# Altium PCB LEDController.PcbDoc
Units mm, origin at the board's own origin, x right, y up, seen from the top; angles counter-clockwise.
Board outline 13.9 x 8.4 mm, 2 copper layers (Top Layer, Bottom Layer), stack 0.67 mm thick; 17 components, 29 nets, 78 pads, 20 vias.
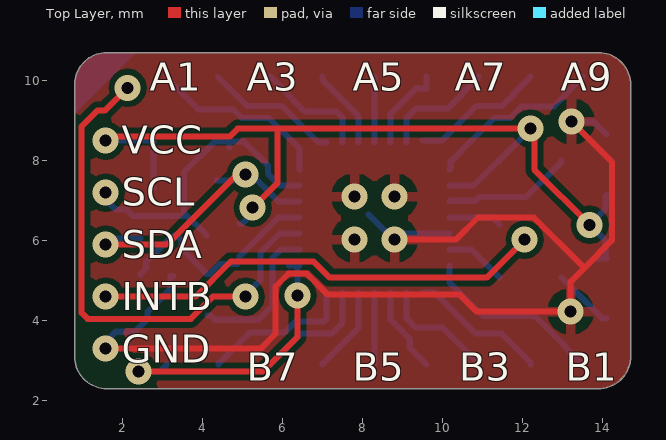
[diagram p0: Top Layer view]
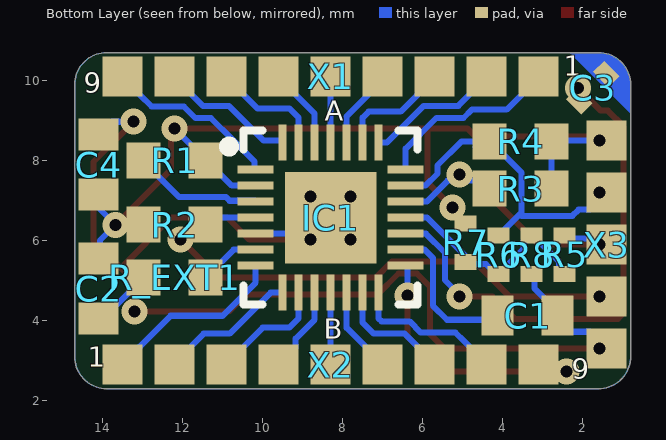
[diagram p1: Bottom Layer view, seen from below]
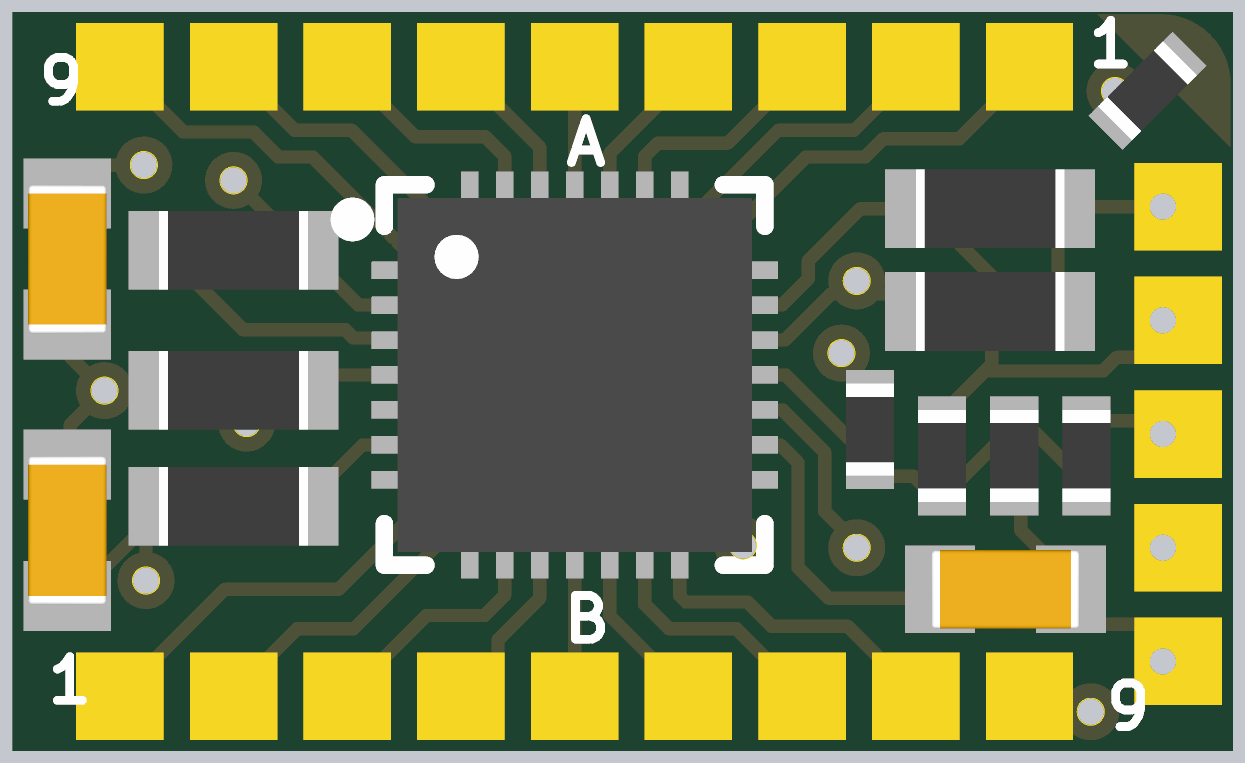
[diagram p2: 3D render of the assembled board from below, using the file's embedded part models]

## Layer stack, top to bottom
Top Solder: solder mask 0.0102, Solder Resist, Dk 3.5
Top Layer: signal copper 0.035
Dielectric 1: dielectric 0.6, FR-4, Dk 4.8
Bottom Layer: signal copper 0.035
Bottom Solder: solder mask 0.0102, Solder Resist, Dk 3.5

## Board outline
0.8,3.1 0.8,9.9 cw(c1.6,9.9) 1.6,10.7 13.9,10.7 cw(c13.9,9.9) 14.7,9.9 14.7,3.1 cw(c13.9,3.1) 13.9,2.3 1.6,2.3 cw(c1.6,3.1)

## Design rules (kind name [scope] priority, off if disabled: settings)
Clearance [All] p1: gap=0.152 ignorepadtopadclearanceinfootprint=FALSE
HoleSize [All] p1: absolutevalues=TRUE maxlimit=20.54 minlimit=0.3 maxpercent=80.000 minpercent=20.000
HoleToHoleClearance [All] p1: gap=0.1 allowstackedmicrovias=TRUE
MinimumSolderMaskSliver [All] p1: minsoldermaskwidth=0.4
PolygonConnect [All] p1: connectstyle=Relief reliefconductorwidth=0.254 reliefentries=4 polygonreliefangle="90 Angle" airgapwidth=0.254
RoutingVias [All] p1: holewidth=0.3 width=0.65 viastyle="Through Hole" minholewidth=0.3 minwidth=0.65 maxholewidth=5 maxwidth=10
SilkToSilkClearance [All] p1: silktosilkclearance=0
SilkToSolderMaskClearance [IsPad] p1: minsilkscreentomaskgap=0 clearancetoexposedcopper=TRUE
SolderMaskExpansion [All] p1: expansion=0
Width [All] p1: maxlimit=2.54 minlimit=0.152 preferedwidth=0.254
25 further rules are at their usual default settings.

## Components (designator, comment, footprint, x,y, rotation, side; value= is the part's Value field where it differs from the comment)
C1 "100nF" CL10B104KB8NNNC 3.375,4.125 r0 bottom
C2 "100nF" CL10B104KB8NNNC 14.1,4.8 r90 bottom
C3 "220nF" RC0402 1.75,9.825 r315 bottom
C4 "1µF" CL10B104KB8NNNC 14.1,7.9 r270 bottom
IC1 "IS31FL3731C" IS31FL3731 8.3,6.575 r180 bottom
R1 "4k7" RC0603 12.2,8 r180 bottom
R2 "4k7" RC0603 12.2,6.4 r0 bottom
R3 "4k7" RC0603 3.55,7.3 r180 bottom
R4 "4k7" RC0603 3.55,8.475 r180 bottom
R5 "0" RC0402 2.45,5.65 r270 bottom
R6 "0" RC0402 4.1,5.65 r270 bottom
R7 "0" RC0402 4.925,5.95 r270 bottom
R8 "0" RC0402 3.275,5.65 r90 bottom
R_EXT1 "20k" RC0603 12.2,5.075 r0 bottom
X1 "A" Connector 8.3,10.1 r0 bottom
X2 "B" Connector 8.3,2.9 r180 bottom
X3 "Connector_5" Connector_5 1.4,5.9 r90 bottom

## Footprints (in the part's own frame and the unit in brackets; to place one, negate y for a bottom-side part, rotate by r counter-clockwise, add the part's x,y. Pads: shape width x height; smd on the part's side, far side on the other; paste and mask are expansions set on the pad)
CL10B104KB8NNNC [mm]
  rect 0.8x1 smd: 1(-0.75,0) 2(0.75,0)
  body extent -0.85,-0.45 0.85,0.45, height 0.9
Connector [mm]
  rect 1x1 smd paste-25.4: 1(-5.2,0) 2(-3.9,0) 3(-2.6,0) 4(-1.3,0) 5(0,0) 6(1.3,0) 7(2.6,0) 8(3.9,0) 9(5.2,0)
Connector_5 [mm]
  rect 1x1 smd paste-25.4: 1(-2.6,0) 2(-1.3,0) 3(0,0) 4(1.3,0) 5(2.6,0)
IS31FL3731 [mm] "QFN, 28-Leads, Body 4,00x4,00mm, Pitch 0,40mm, Thermal Pad 2,28x2,28mm, IPC Medium Density"
  rect 0.9x0.2 smd: 1(-1.875,1.2) 2(-1.875,0.8) 3(-1.875,0.4) 4(-1.875,0) 5(-1.875,-0.4) 6(-1.875,-0.8) 7(-1.875,-1.2) 15(1.875,-1.2) 16(1.875,-0.8) 17(1.875,-0.4) 18(1.875,0) 19(1.875,0.4) 20(1.875,0.8) 21(1.875,1.2)
  rect 0.2x0.9 smd: 8(-1.2,-1.875) 9(-0.8,-1.875) 10(-0.4,-1.875) 11(0,-1.875) 12(0.4,-1.875) 13(0.8,-1.875) 14(1.2,-1.875) 22(1.2,1.875) 23(0.8,1.875) 24(0.4,1.875) 25(0,1.875) 26(-0.4,1.875) 27(-0.8,1.875) 28(-1.2,1.875)
  rect 2.28x2.28 smd paste-254: 29(0,0)
  silkscreen extent -2.67,-2.17 2.17,2.17, body extent -2.03,-2.03 2.03,2.03, height 0.75
RC0402 [mm]
  rect 0.4x0.55 smd: 1(-0.48,0) 2(0.48,0)
  body extent -0.52,-0.28 0.53,0.28, height 0.4
RC0603 [mm]
  rect 0.85x0.9 smd: 1(-0.775,0) 2(0.775,0)
  body extent -0.85,-0.45 0.85,0.45, height 0.55

## Part data
C1 C2: library part CL10B104KB8NNNC, "Capacitor: ceramic; MLCC; 100nF; 50V; X7R; ±10%; SMD; 0603; -55÷125°C", Case/Package=0603, Case Code (Metric)=1608, Dielectric=X7R, Manufacturer=Samsung, Max Operating Temperature=125°C, Min Operating Temperature=-55°C, Package Quantity=1, Supplier Part Number 1=1276-1000-1-ND, Tolerance=10%, Voltage=50V, Capacitance=100nF, Case Code (Imperial)=0603, ComponentLink1Description=https://datasheet.ciiva.com/25803/cl10b104kb8nnnc-25803393.pdf?src-supplier=Digi-Key, ComponentLink1URL=https://datasheet.ciiva.com/25803/cl10b104kb8nnnc-25803393.pdf?src-supplier=Digi-Key, ComponentLink2Description=https://datasheet.ciiva.com/26838/getdatasheetpartid-89097-26838411.pdf?src-supplier=Verical, ComponentLink2URL=https://datasheet.ciiva.com/26838/getdatasheetpartid-89097-26838411.pdf?src-supplier=Verical, ComponentLink3Description=https://datasheet.ciiva.com/29198/456651-da-01-en-vs-kondensator-0605-29198839.pdf?src-supplier=Conrad, ComponentLink3URL=https://datasheet.ciiva.com/29198/456651-da-01-en-vs-kondensator-0605-29198839.pdf?src-supplier=Conrad, Contact Plating=Tin, Depth=0.8mm, Height=0.8mm, Lead Free="Lead Free", Length=1.6mm, Manufacturer Part Number=CL10B104KB8NNNC, Material=Ceramic, Mount="Surface Mount", Packaging="Tape and Reel", Pricing 1="1 = 0,10000, 10 = 0,02800, 100 = 0,01230, 500 = 0,00878, 1000 = 0,00690 (USD)", Radiation Hardening=No, RoHS=Yes, Stock 1=12121642, Supplier 1=Digi-Key, Thickness=0.035inch, Voltage Rating=50V, Voltage Rating (DC)=50V, Width=0.031inch
C3: library part CC0402KRX5R6BB224, "CAP CER 0.22UF 10V X5R 0402", Case/Package=0402, Case Code (Metric)=1005, Dielectric=X5R, Dielectric Material=Ceramic, Manufacturer=Yageo, Max Operating Temperature=85°C, Min Operating Temperature=-55°C, Package Quantity=10000, Supplier Part Number 1=311-1421-1-ND, Tolerance=10%, Voltage Rating=10V, Capacitance=220nF, Case Code (Imperial)=0402, ComponentLink1Description=https://datasheet.ciiva.com/176/mlccorderingcode-176912.pdf?src-supplier=Digi-Key, ComponentLink1URL=https://datasheet.ciiva.com/176/mlccorderingcode-176912.pdf?src-supplier=Digi-Key, ComponentLink2Description=https://datasheet.ciiva.com/176/mlccorderingcode-176913.pdf?src-supplier=Digi-Key, ComponentLink2URL=https://datasheet.ciiva.com/176/mlccorderingcode-176913.pdf?src-supplier=Digi-Key, ComponentLink3Description=https://datasheet.ciiva.com/8033/1525783-8033653.pdf?src-supplier=Element14, ComponentLink3URL=https://datasheet.ciiva.com/8033/1525783-8033653.pdf?src-supplier=Element14, ComponentLink4Description=https://datasheet.ciiva.com/16624/upy-gphc-x5r-4v-to-50v-12-16624733.pdf?src-supplier=Avnet+Europe, ComponentLink4URL=https://datasheet.ciiva.com/16624/upy-gphc-x5r-4v-to-50v-12-16624733.pdf?src-supplier=Avnet+Europe, ComponentLink5Description=https://datasheet.ciiva.com/28450/1359354-28450298.pdf?src-supplier=Element14, ComponentLink5URL=https://datasheet.ciiva.com/28450/1359354-28450298.pdf?src-supplier=Element14, ComponentLink6Description=https://datasheet.ciiva.com/176/mlccorderingcode-176911.pdf?src-supplier=Digi-Key, ComponentLink6URL=https://datasheet.ciiva.com/176/mlccorderingcode-176911.pdf?src-supplier=Digi-Key, Composition=Ceramic, Depth=0.5mm, Halogen Free="Halogen Free", Height=0.5mm, Lead Free="Lead Free", Length=1mm, Manufacturer Part Number=CC0402KRX5R6BB224, Mount="Surface Mount", Packaging="Tape and Reel", Pricing 1="1 = 0,10000, 10 = 0,05700, 100 = 0,02530, 500 = 0,01808, 1000 = 0,01421, 2500 = 0,01292, 5000 = 0,01188 (USD)", Radiation Hardening=No, REACH SVHC=Unknown, RoHS=Yes, Stock 1=215238, Supplier 1=Digi-Key, Termination=SMD/SMT, Thickness=0.022inch, Voltage Rating (DC)=10V, Weight=2.3E-05oz, Width=0.02inch
C4: library part CL10A105KA8NNNC, "Cap Ceramic 1uF 25V X5R 10% Pad SMD 0603 85°C T/R", Capacitance=1uF, Case/Package=0603, Case Code (Metric)=1608, Dielectric=X5R, Manufacturer=Samsung, Max Operating Temperature=85°C, Min Operating Temperature=-55°C, Package Quantity=1, Supplier Part Number 1=1276-1102-1-ND, Tolerance=10%, Voltage=25V, Case Code (Imperial)=0603, ComponentLink1Description=https://datasheet.ciiva.com/25801/cl10a105ka8nnnc-25801364.pdf?src-supplier=Digi-Key, ComponentLink1URL=https://datasheet.ciiva.com/25801/cl10a105ka8nnnc-25801364.pdf?src-supplier=Digi-Key, ComponentLink2Description=https://datasheet.ciiva.com/26838/getdatasheetpartid-357530-26838332.pdf?src-supplier=Verical, ComponentLink2URL=https://datasheet.ciiva.com/26838/getdatasheetpartid-357530-26838332.pdf?src-supplier=Verical, ComponentLink3Description=https://datasheet.ciiva.com/29198/458162-da-01-en-vs-kondensator-0603-29198475.pdf?src-supplier=Conrad, ComponentLink3URL=https://datasheet.ciiva.com/29198/458162-da-01-en-vs-kondensator-0603-29198475.pdf?src-supplier=Conrad, Contact Plating=Tin, Depth=0.8mm, Height=0.8mm, Lead Free="Lead Free", Length=1.6mm, Manufacturer Part Number=CL10A105KA8NNNC, Material=Ceramic, Mount="Surface Mount", Packaging="Tape and Reel", Pricing 1="1 = 0,100000, 10 = 0,041000, 100 = 0,018500, 500 = 0,013200, 1000 = 0,010370 (USD)", Radiation Hardening=No, RoHS=Yes, Stock 1=5127242, Supplier 1=Digi-Key, Thickness=0.035inch, Voltage Rating=25V, Voltage Rating (DC)=25V, Width=0.031inch
IC1: library part IS31FL3731C-QFLS2-TR, "LED Lighting Drivers Audio Modulated 144 Dot LED Driver", Case/Package=QFN, Frequency=400kHz, High Level Output Current=5nA, Manufacturer=ISSI, Max Operating Temperature=85°C, Max Supply Current=2.17mA, Max Supply Voltage=5.5V, Min Operating Temperature=-40°C, Output Current=34mA, Package Quantity=2500, Supplier Part Number 1=706-1480-1-ND, ComponentLink1Description=http://www.mouser.com/ds/2/198/31FL3731-258525.pdf?src-supplier=Mouser, ComponentLink1URL=http://www.mouser.com/ds/2/198/31FL3731-258525.pdf?src-supplier=Mouser, ComponentLink2Description=http://www.issi.com/WW/pdf/Analog_Part_Decoder.pdf?src-supplier=Digi-Key, ComponentLink2URL=http://www.issi.com/WW/pdf/Analog_Part_Decoder.pdf?src-supplier=Digi-Key, Dimming=Analog, Low Level Output Current=5nA, Manufacturer Part Number=IS31FL3731C-QFLS2-TR, Mount="Surface Mount", Number of Outputs=18, Number of Pins=28, Output Current per Channel=34mA, Packaging="Tape and Reel", Pricing 1="1 = 2,01000, 10 = 1,81700, 25 = 1,62240, 100 = 1,46000, 250 = 1,29780, 500 = 1,13558, 1000 = 0,94091 (USD)", RoHS=Yes, Stock 1=2653, Supplier 1=Digi-Key, Weight=0.002497oz
R1 R2 R3 R4: library part RC0603JR-074K7L, "RES SMD 4.7K OHM 5% 1/10W 0603", Case/Package=0603, Case Code (Metric)=1608, Manufacturer=Yageo, Max Operating Temperature=155°C, Min Operating Temperature=-55°C, Power Rating=100mW, Resistance=4.7kR, Supplier Part Number 1=311-4.7KGRCT-ND, Temperature Coefficient=100ppm/°C, Tolerance=5%, Voltage Rating=50V, Case Code (Imperial)=0603, ComponentLink1Description=https://datasheet.ciiva.com/46412/443971-46412858.pdf?src-supplier=Element14, ComponentLink1URL=https://datasheet.ciiva.com/46412/443971-46412858.pdf?src-supplier=Element14, Composition="Thick Film", Depth=0.8mm, Lead Free="Lead Free", Length=1.6mm, Manufacturer Part Number=RC0603JR-074K7L, Military Standard=Not, Number of Pins=2, Packaging="Tape and Reel", Pricing 1="1 = 0,10000, 10 = 0,02000, 100 = 0,00810, 1000 = 0,00362, 2500 = 0,00314 (USD)", REACH SVHC="No SVHC", RoHS=Yes, Stock 1=16673716, Supplier 1=Digi-Key, Termination=SMD/SMT, Voltage Rating (DC)=50V, Width=0.8mm
R5 R6 R7 R8: library part RC0402JR-070RL, "RES SMD 0 OHM JUMPER 1/16W 0402", Case/Package=0402, Case Code (Metric)=1005, Manufacturer=Yageo, Max Operating Temperature=155°C, Max Power Dissipation=63mW, Min Operating Temperature=-55°C, Package Quantity=1, Power Rating=62.5mW, Resistance=0mR, Supplier Part Number 1=311-0.0JRCT-ND, Temperature Coefficient=200ppm/°C, Tolerance=5%, Voltage Rating=50V, Case Code (Imperial)=0402, ComponentLink1Description=https://datasheet.ciiva.com/2452/pyu-rc0402-51-rohs-l-6-2452608.pdf?src-supplier=Digi-Key, ComponentLink1URL=https://datasheet.ciiva.com/2452/pyu-rc0402-51-rohs-l-6-2452608.pdf?src-supplier=Digi-Key, ComponentLink2Description=https://datasheet.ciiva.com/11808/0900766b80c66297-11808195.pdf?src-supplier=RSComponents, ComponentLink2URL=https://datasheet.ciiva.com/11808/0900766b80c66297-11808195.pdf?src-supplier=RSComponents, ComponentLink3Description=https://datasheet.ciiva.com/2452/pyu-r-int-thick-7-2452609.pdf?src-supplier=Digi-Key, ComponentLink3URL=https://datasheet.ciiva.com/2452/pyu-r-int-thick-7-2452609.pdf?src-supplier=Digi-Key, ComponentLink4Description=https://datasheet.ciiva.com/2452/pyu-r-int-thick-7-2452610.pdf?src-supplier=Digi-Key, ComponentLink4URL=https://datasheet.ciiva.com/2452/pyu-r-int-thick-7-2452610.pdf?src-supplier=Digi-Key, ComponentLink5Description=https://datasheet.ciiva.com/8896/pyu-rc0402-51-rohs-l-6-8896201.pdf?src-supplier=Avnet, ComponentLink5URL=https://datasheet.ciiva.com/8896/pyu-rc0402-51-rohs-l-6-8896201.pdf?src-supplier=Avnet, ComponentLink6Description=https://datasheet.ciiva.com/28386/pyu-rc0402-51-rohs-l-6-28386633.pdf?src-supplier=Avnet+Europe, ComponentLink6URL=https://datasheet.ciiva.com/28386/pyu-rc0402-51-rohs-l-6-28386633.pdf?src-supplier=Avnet+Europe, ComponentLink7Description=https://datasheet.ciiva.com/22747/1018594-22747515.pdf?src-supplier=Element14, ComponentLink7URL=https://datasheet.ciiva.com/22747/1018594-22747515.pdf?src-supplier=Element14, ComponentLink8Description=https://datasheet.ciiva.com/15189/getdatasheetpartid-326379-15189533.pdf?src-supplier=Verical, ComponentLink8URL=https://datasheet.ciiva.com/15189/getdatasheetpartid-326379-15189533.pdf?src-supplier=Verical, ComponentLink9Description=https://datasheet.ciiva.com/7983/1018594-7983535.pdf?src-supplier=Element14, ComponentLink9URL=https://datasheet.ciiva.com/7983/1018594-7983535.pdf?src-supplier=Element14, Composition="Thick Film", Contact Plating=Tin, Depth=0.5mm, Features="Moisture Resistant", Height=0.016inch, Lead Free="Lead Free", Length=1mm, Manufacturer Part Number=RC0402JR-070RL, Military Standard=Not, Number of Terminations=2, Packaging="Tape and Reel", Pricing 1="1 = 0,10000, 10 = 0,01500, 25 = 0,01080, 50 = 0,00800, 100 = 0,00600, 250 = 0,00456, 500 = 0,00364, 1000 = 0,00268, 5000 = 0,00192 (USD)", Radiation Hardening=No, REACH SVHC=Unknown, RoHS=Yes, Stock 1=80146051, Supplier 1=Digi-Key, Termination=SMD/SMT, Width=0.02inch
R_EXT1: library part RC0603FR-0720KL, "RES SMD 20K OHM 1% 1/10W 0603", Case/Package=0603, Case Code (Metric)=1608, Manufacturer=Yageo, Max Operating Temperature=155°C, Max Power Dissipation=100mW, Min Operating Temperature=-55°C, Package Quantity=1, Resistance=20kR, Supplier Part Number 1=311-20.0KHRCT-ND, Temperature Coefficient=100ppm/°C, Tolerance=1%, Voltage Rating=50V, Case Code (Imperial)=0603, ComponentLink1Description=https://datasheet.ciiva.com/11808/0900766b80f96399-11808275.pdf?src-supplier=RSComponents, ComponentLink1URL=https://datasheet.ciiva.com/11808/0900766b80f96399-11808275.pdf?src-supplier=RSComponents, ComponentLink2Description=https://datasheet.ciiva.com/22747/443971-22747525.pdf?src-supplier=Element14, ComponentLink2URL=https://datasheet.ciiva.com/22747/443971-22747525.pdf?src-supplier=Element14, ComponentLink3Description=https://datasheet.ciiva.com/2453/pyu-r-int-thick-7-2453910.pdf?src-supplier=Digi-Key, ComponentLink3URL=https://datasheet.ciiva.com/2453/pyu-r-int-thick-7-2453910.pdf?src-supplier=Digi-Key, ComponentLink4Description=https://datasheet.ciiva.com/2453/pyu-r-int-thick-7-2453911.pdf?src-supplier=Digi-Key, ComponentLink4URL=https://datasheet.ciiva.com/2453/pyu-r-int-thick-7-2453911.pdf?src-supplier=Digi-Key, ComponentLink5Description=https://datasheet.ciiva.com/2453/pyu-r-int-thick-7-2453912.pdf?src-supplier=Digi-Key, ComponentLink5URL=https://datasheet.ciiva.com/2453/pyu-r-int-thick-7-2453912.pdf?src-supplier=Digi-Key, Composition="Thick Film", Depth=0.8mm, Features="Moisture Resistant", Height=0.022inch, Lead Free="Lead Free", Length=0.063inch, Manufacturer Part Number=RC0603FR-0720KL, Military Standard=Not, Number of Pins=2, Number of Terminations=2, Packaging="Tape and Reel", Power Rating=100mW, Pricing 1="1 = 0,10000, 10 = 0,02400, 100 = 0,00970, 1000 = 0,00437, 2500 = 0,00379 (USD)", REACH SVHC="No SVHC", RoHS=Yes, Stock 1=8068424, Supplier 1=Digi-Key, Termination=SMD/SMT, Voltage Rating (DC)=50V, Width=0.031inch
X1 X2: library part Connector

## Via types
v1: diameter 0.65, hole 0.3, Top Layer to Bottom Layer, tented both sides, 15 vias
v2: diameter 0.65, hole 0.3, Top Layer to Bottom Layer, tented top, 5 vias

## Nets (pads, with @x,y where several pads share a name; then routed paths per layer and width w, separated by ;. In a path a pad name is that pad's centre, name@x,y a point inside that pad or via, vN(x,y) a via of type N, cw(c..) or ccw(c..) an arc to the next point about the centre after c; other vN are vias at no path point)
AD: IC1.18 R5.2 R6.2 R7.2 R8.2 | length 5.7
  Bottom Layer w0.152: R5.2@2.45,5.145 R5.2 2.59,5.31 2.59,5.47 3.2,6.08 R8.2@3.302,6.08 ; R8.2 3.35,6.13 3.474,6.006 3.474,5.796 R6.2 4.175,5.17 4.421,5.416 4.871,5.416 R7.2 4.925,5.61 5.89,6.575 IC1.18
Audio: C3.1
CA1: IC1.21 X1.1 | length 4.6
  Bottom Layer w0.152: X1.1 3.1,10.077 3.902,9.275 4.771,9.275 4.979,9.067 5.657,9.067 6.425,8.298 IC1.21
CA2: IC1.22 X1.2 | length 3.4
  Bottom Layer w0.152: X1.2@4.388,10.088 5.105,9.371 5.974,9.371 6.896,8.45 IC1.22
CA3: IC1.23 X1.3 | length 2.9
  Bottom Layer w0.152: X1.3 6.124,9.676 6.124,9.653 6.551,9.226 7.348,9.226 7.5,9.074 IC1.23
CA4: IC1.24 X1.4 | length 2
  Bottom Layer w0.152: X1.4 7,10.005 7.9,9.105 IC1.24
CA5: IC1.25 X1.5 | length 1.6
  Bottom Layer w0.152: IC1.25 X1.5
CA6: IC1.26 X1.6 | length 2.2
  Bottom Layer w0.152: IC1.26 8.7,9.177 9.326,9.803 9.6,9.803 X1.6
CA7: IC1.27 X1.7 | length 2.9
  Bottom Layer w0.152: IC1.27 9.1,9.075 9.325,9.3 10.123,9.3 10.476,9.653 10.476,9.676 X1.7
CA8: IC1.28 X1.8 | length 3.4
  Bottom Layer w0.152: IC1.28@9.5,8.5 9.975,8.5 10.846,9.371 11.495,9.371 11.776,9.653 11.776,9.676 X1.8
CA9: IC1.1 X1.9 | length 4.4
  Bottom Layer w0.152: IC1.1@10.176,7.775 10.2,7.799 10.2,7.975 10.744,8.519 10.746,8.519 11.293,9.067 11.684,9.067 11.971,9.354 12.777,9.354 13.076,9.653 13.076,9.676 X1.9
CB1: IC1.7 X2.1 | length 4.6
  Bottom Layer w0.152: IC1.7 10.175,4.95 11.001,4.124 12.299,4.124 13.076,3.347 13.076,3.324 X2.1
CB2: IC1.8 X2.2 | length 3.5
  Bottom Layer w0.152: IC1.8 9.8,4.7 10.825,3.675 11.475,3.675 12.2,2.95 X2.2
CB3: IC1.9 X2.3 | length 2.9
  Bottom Layer w0.152: IC1.9 9.1,4.056 9.331,3.825 9.998,3.825 10.9,2.923 X2.3
CB4: IC1.10 X2.4 | length 2.2
  Bottom Layer w0.152: IC1.10 8.7,4.025 9.176,3.549 9.176,3.324 X2.4
CB5: IC1.11 X2.5 | length 1.8
  Bottom Layer w0.152: X2.5 IC1.11
CB6: IC1.12 X2.6 | length 2.2
  Bottom Layer w0.152: X2.6 7,2.923 7.9,3.823 IC1.12
CB7: IC1.13 X2.7 | length 3
  Bottom Layer w0.152: X2.7 5.7,2.923 6.452,3.675 7.223,3.675 7.5,3.952 IC1.13
CB8: IC1.14 X2.8 | length 3.8
  Bottom Layer w0.152: X2.8 4.4,2.923 4.971,3.495 5.179,3.703 5.595,3.703 5.878,3.703 6.048,3.703 6.325,3.98 7.027,3.98 7.1,4.052 IC1.14
CB9: IC1.15 X2.9 | length 7.4
  Top Layer w0.152: v1(2.4,2.725) 5.502,2.725 6.375,3.598 v1(6.375,4.625)
  Bottom Layer w0.152: v1(2.4,2.725) 2.925,2.725 X2.9 ; v1@6.132,4.607 6.15,4.625 v1(6.375,4.625) IC1.15@6.375,5.375 ; IC1.15@6.156,5.375 IC1.15@6.375,5.375 ; IC1.15 IC1.15@6.375,5.375
GND: C1.1 C2.1 C4.1 IC1.5 IC1.29 R8.1 R_EXT1.2 X3.1 | length 32.8
  Top Layer w0.152: v2(1.575,3.3) 5.45,3.3 5.821,3.671 5.821,4.854 6.146,5.179 6.604,5.179 7.133,4.65 10.425,4.65 10.85,4.225 v1(13.2,4.225) 13.2,4.978 13.522,5.3 ; v1(8.8,6.025) 10.33,6.025 10.884,6.579 12.279,6.579 13.522,5.336 13.522,5.3 ; v1(13.225,8.975) 14.229,7.971 14.229,6.007 13.522,5.3
  Bottom Layer w0.152: v2(1.575,3.3) 1.575,3.475 1.824,3.724 2.301,3.724 2.625,4.048 C1.1 2.625,4.225 3.2,4.8 3.2,5.12 R8.1@3.275,5.12 ; IC1.29@8.15,6.65 8.625,6.175 IC1.5 ; R_EXT1.2 R_EXT1.2@13.2,4.85 ; v1(13.2,4.225) R_EXT1.2@13.2,4.85 ; v1(13.225,8.975) v1(13.225,8.975) 13.776,8.974 C4.1 ; C2.1 14,4.05 R_EXT1.2@13.2,4.85
  other v1: 7.8,6.025 7.8,7.1 8.8,7.1
INTB: IC1.4 R2.1 X3.2 | length 12.7
  Top Layer w0.152: v2(1.575,4.6) 3.825,4.6 4.708,5.483 6.767,5.483 7.175,5.075 11.1,5.075 v1(12.05,6.025)
  Bottom Layer w0.152: IC1.4 11.25,6.575 R2.1
NetC1_2: C1.2 IC1.16 | length 3.8
  Bottom Layer w0.152: C1.2 4.2,4.125 4.303,4.022 5.392,4.022 5.746,4.376 5.746,5.57 5.952,5.775 IC1.16
NetC3_2: C3.2 IC1.17 | length 13
  Top Layer w0.152: v1@2.122,9.822 1.55,9.25 1.367,9.25 0.975,8.858 0.975,4.195 1.124,4.046 3.702,4.046 4.256,4.6 v1(5.075,4.6)
  Bottom Layer w0.152: v1(5.075,4.6) 5.075,4.647 5.442,5.013 5.442,5.696 5.921,6.175 IC1.17
  other v1: 2.123,9.822
NetIC1_6: IC1.6 R_EXT1.1 | length 1.5
  Bottom Layer w0.152: IC1.6 10.725,5.775 R_EXT1.1
SCL: IC1.20 R4.1 R6.1 X3.4 | length 7.9
  Bottom Layer w0.152: v2(1.575,7.2) 1.575,7.025 1.824,6.776 2.101,6.776 2.255,6.621 3.532,6.621 ; R6.1 3.532,6.698 3.532,7.705 4.302,8.475 R4.1 5.034,8.475 5.629,7.88 5.629,7.676 5.93,7.375 IC1.20 ; R4.1@4.675,8.325 R4.1@4.675,8.35
SDA: IC1.19 R3.1 R5.1 X3.3 | length 7.6
  Top Layer w0.152: v2(1.575,5.9) 3.1,5.9 4.85,7.65 v1(5.075,7.65)
  Bottom Layer w0.152: v2(1.575,5.9) 1.575,6.025 1.55,6.05 R5.1@2.45,6.05 ; R3.1@4.35,7.5 5.374,7.5 5.899,6.975 IC1.19
SDB: IC1.3 R1.1 | length 3.2
  Bottom Layer w0.152: IC1.3 10.199,6.999 10.826,6.999 10.921,7.094 12.094,7.094 12.975,7.975 R1.1
VCC: C2.2 C4.2 IC1.2 R1.2 R2.2 R3.2 R4.2 R7.1 X3.5 | length 23.9
  Top Layer w0.152: v2(1.575,8.5) 1.675,8.6 4.675,8.6 4.875,8.8 5.875,8.8 ; v1(5.25,6.825) 5.875,7.45 5.875,8.8 ; v1(13.675,6.396) 12.295,7.776 12.295,8.705 v1(12.2,8.8) 5.875,8.8
  Bottom Layer w0.152: v2(1.575,8.5) 2.75,8.5 R4.2 R3.2 ; R7.1 5,6.43 5.155,6.585 5.155,6.73 v1(5.25,6.825) ; IC1.2 10.771,7.375 11.371,7.975 11.425,7.975 R1.2 11.425,8.025 v1(12.2,8.8) ; C2.2@13.8,5.55 C2.2 14.066,5.584 14.066,6.005 v1(13.675,6.396) 14.066,6.788 14.066,7.116 C4.2

## Polygon pours and split planes (outlines as drawn)
GND on Bottom Layer "GND_Bottom" (solid, pour order 0): 0.8,3.1 0.8,9.9 cw(c1.6,9.9) 1.6,10.7 13.9,10.7 cw(c13.9,9.9) 14.7,9.9 14.7,3.1 cw(c13.9,3.1) 13.9,2.3 1.6,2.3 cw(c1.6,3.1)
GND on Top Layer "Top Layer-GND" (solid, pour order 1): 0.8,3.1 0.8,9.9 cw(c1.6,9.9) 1.6,10.7 13.9,10.7 cw(c13.9,9.9) 14.7,9.9 14.7,3.1 cw(c13.9,3.1) 13.9,2.3 1.6,2.3 cw(c1.6,3.1)
no net on Bottom Solder (solid): 7.15,5.425 9.45,5.425 9.45,7.725 7.15,7.725
no net on Bottom Solder (solid, shelved): 7.15,5.425 9.45,5.425 9.45,7.725 7.15,7.725
no net on Bottom Solder (solid, shelved): 16,12
no net on Bottom Solder (solid, shelved): 16.35,10.925
no net on Bottom Paste (solid): 7.15,5.425 9.45,5.425 9.45,7.725 7.15,7.725

## Other copper
Bottom Layer:
  region net Audio: 0.8,9.176 2.326,10.7 1.6,10.7 ccw(c1.6,9.9) 1.034,10.466 ccw(c1.6,9.9) 0.8,9.9
  region: 0.95,9.325

## Silkscreen, mask and mechanical layers (free items; w line width, h text height)
Top Overlay:
  text "A1" at 2.675,9.75 h0.7
  text "A3" at 5.1,9.75 h0.7
  text "A5" at 7.75,9.75 h0.7
  text "A7" at 10.3,9.75 h0.7
  text "A9" at 12.95,9.75 h0.7
  text "VCC" at 1.975,8.175 h0.7
  text "SCL" at 1.975,6.869 h0.7
  text "SDA" at 1.975,5.562 h0.7
  text "INTB" at 1.975,4.256 h0.7
  text "GND" at 1.975,2.95 h0.7
  text "B7" at 5.1,2.5 h0.7
  text "B5" at 7.758,2.5 h0.7
  text "B3" at 10.417,2.5 h0.7
  text "B1" at 13.075,2.5 h0.7
Bottom Overlay:
  text "1" at 2.475,10.125 h0.5
  text "9" at 14.475,9.7 h0.5
  text "A" at 8.45,9 h0.5
  text "B" at 8.475,3.55 h0.5
  text "1" at 14.375,2.85 h0.5
  text "9" at 2.275,2.55 h0.5
Bottom Paste:
  pour cut-out: 8.475,6.025 ccw(c8.8,6.025) 8.8,5.7 ccw(c8.8,6.025) 9.125,6.025 ccw(c8.8,6.025) 8.8,6.35 ccw(c8.8,6.025)
  pour cut-out: 7.475,6.025 ccw(c7.8,6.025) 7.8,5.7 ccw(c7.8,6.025) 8.125,6.025 ccw(c7.8,6.025) 7.8,6.35 ccw(c7.8,6.025)
  pour cut-out: 7.475,7.1 ccw(c7.8,7.1) 7.8,6.775 ccw(c7.8,7.1) 8.125,7.1 ccw(c7.8,7.1) 7.8,7.425 ccw(c7.8,7.1)
  pour cut-out: 8.475,7.1 ccw(c8.8,7.1) 8.8,6.775 ccw(c8.8,7.1) 9.125,7.1 ccw(c8.8,7.1) 8.8,7.425 ccw(c8.8,7.1)
Bottom Solder:
  pour cut-out: 8.475,7.1 ccw(c8.8,7.1) 8.8,6.775 ccw(c8.8,7.1) 9.125,7.1 ccw(c8.8,7.1) 8.8,7.425 ccw(c8.8,7.1)
  pour cut-out: 7.475,7.1 ccw(c7.8,7.1) 7.8,6.775 ccw(c7.8,7.1) 8.125,7.1 ccw(c7.8,7.1) 7.8,7.425 ccw(c7.8,7.1)
  pour cut-out: 7.475,6.025 ccw(c7.8,6.025) 7.8,5.7 ccw(c7.8,6.025) 8.125,6.025 ccw(c7.8,6.025) 7.8,6.35 ccw(c7.8,6.025)
  pour cut-out: 8.475,6.025 ccw(c8.8,6.025) 8.8,5.7 ccw(c8.8,6.025) 9.125,6.025 ccw(c8.8,6.025) 8.8,6.35 ccw(c8.8,6.025)
Mechanical 2:
  the board outline again, w0.2
Mechanical 5:
  lines w1: 15.2,9.9 ccw(c13.9,9.9) 13.9,11.2 ; 0.3,3.1 ccw(c1.6,3.1) 1.6,1.8 ; 0.3,3.1 cw(c0.8,3.1) 0.3,3.102 0.3,3.1 ; 0.3,9.898 cw(c0.8,9.9) 0.3,9.9 ; 0.3,9.898 cw(c0.8,9.9) 0.3,9.9 ; 0.3,9.898 0.3,9.9 ; 0.3,9.9 cw(c1.6,9.9) 1.6,11.2 ; 1.6,1.8 ccw(c1.6,2.3) 1.602,1.8 ; 1.6,1.8 ccw(c1.6,2.3) 1.602,1.8 ; 1.6,1.8 1.602,1.8 ; 1.6,11.2 cw(c1.6,10.7) 1.602,11.2 ; 1.6,11.2 cw(c1.6,10.7) 1.602,11.2 ; 1.6,11.2 1.602,11.2 ; 1.602,1.8 13.898,1.8 ; 1.602,11.2 13.898,11.2 ; 13.898,1.8 ccw(c13.9,2.3) 13.9,1.8 ; 13.898,1.8 ccw(c13.9,2.3) 13.9,1.8 ; 13.898,1.8 13.9,1.8 ; 13.898,11.2 cw(c13.9,10.7) 13.9,11.2 ; 13.898,11.2 cw(c13.9,10.7) 13.9,11.2 ; 13.898,11.2 13.9,11.2 ; 13.9,1.8 ccw(c13.9,3.1) 15.2,3.1 ; 15.2,3.1 ccw(c14.7,3.1) 15.2,3.102 ; 15.2,3.1 ccw(c14.7,3.1) 15.2,3.102 ; 15.2,3.1 15.2,3.102